# Altium PCB honda_nidec_giraffe20.pcbdoc
Units mil, origin at the board's own origin, x right, y up, seen from the top; angles counter-clockwise.
Board outline 4959.99 x 2260 mil, 2 copper layers (Top Layer, Bottom Layer); 6 components, 21 nets, 86 pads, 34 vias.
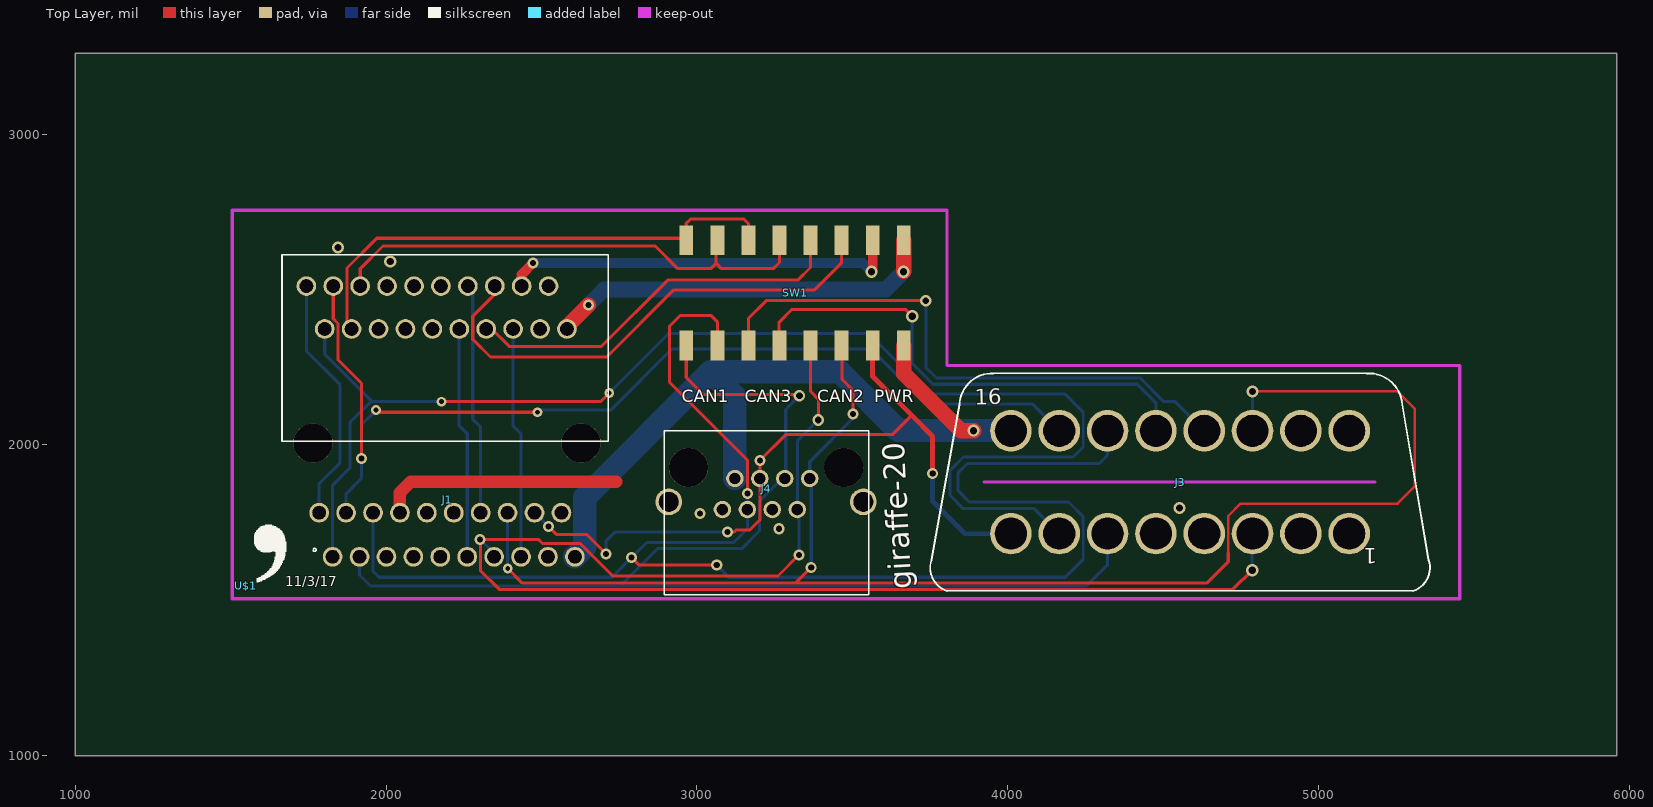
[diagram p0: Top Layer view]
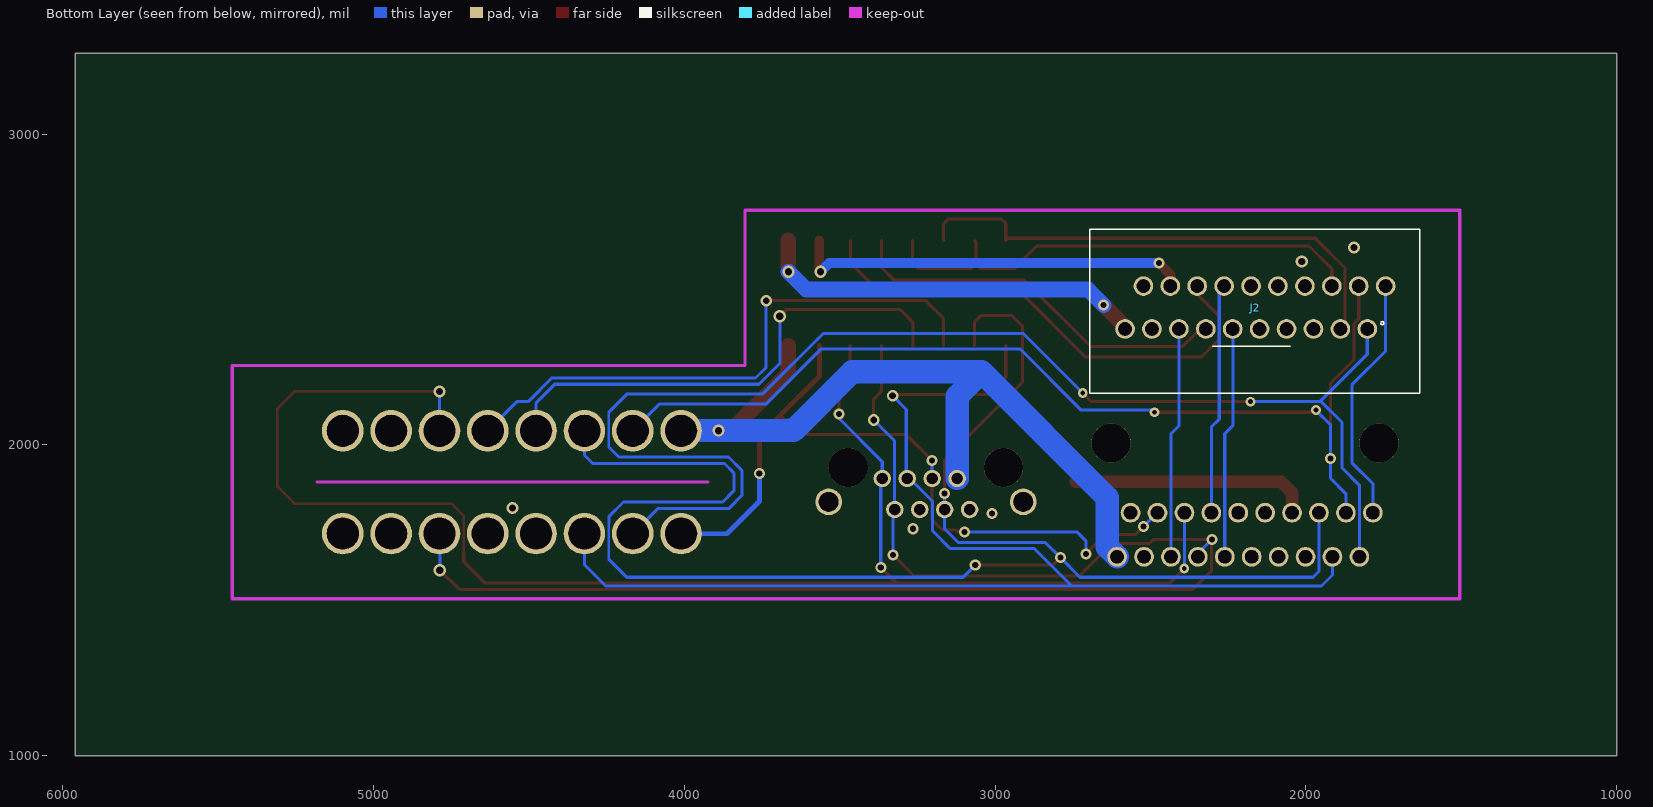
[diagram p1: Bottom Layer view, seen from below]

## Layer stack, top to bottom
Top Layer: signal copper (thickness not stored)
Dielectric: dielectric 12.6, FR-4, Dk 4.8
Bottom Layer: signal copper (thickness not stored)

## Board outline
5959.99,1000 1000,1000 1000,3260 5959.99,3260

## Components (designator, comment, footprint, x,y, rotation, side; value= is the part's Value field where it differs from the comment)
J1 "_" 2X10(RA) 2215,1712 r180 top
J2 "_" 2X10(JAE_FEMALE) 2145,2442 r0 bottom
J3 "OBDII-FEMALE-CUT" OBDII-FEMALE-MIDCUT 4554.99,1880 r0 top
J4 "VERT_RJ45" GLX-S-88M 3226.26,1730 r0 top
SW1 "4XDPSTSMT" 4-DPST 3316.02,2489 r0 top
U$1 "_" LOGO 1549,1546 r0 top

## Footprints (in the part's own frame and the unit in brackets; to place one, negate y for a bottom-side part, rotate by r counter-clockwise, add the part's x,y. Pads: shape width x height; smd on the part's side, far side on the other; paste and mask are expansions set on the pad)
2X10(JAE_FEMALE) [mm]
  round 1.608 hole 1.1 slot 1.1 at 0 deg: 1(-8.7,1.75) 2(-6.5,1.75) 3(-4.3,1.75) 4(-2.1,1.75) 5(0.1,1.75) 6(2.3,1.75) 7(4.5,1.75) 8(6.7,1.75) 9(8.9,1.75) 10(11.1,1.75) 11(-10.2,-1.75) 12(-8,-1.75) 13(-5.8,-1.75) 14(-3.6,-1.75) 15(-1.4,-1.75) 16(0.8,-1.75) 17(3,-1.75) 18(5.2,-1.75) 19(7.4,-1.75) 20(9.6,-1.75)
  silkscreen extent -13,-6.4 14,7
2X10(RA) [mm]
  round 1.608 hole 1.1 slot 1.1 at 0 deg: 1(9.83,1.83) 2(7.63,1.83) 3(5.43,1.83) 4(3.23,1.83) 5(1.03,1.83) 6(-1.17,1.83) 7(-3.37,1.83) 8(-5.57,1.83) 9(-7.77,1.83) 10(-9.97,1.83) 11(10.93,-1.77) 12(8.73,-1.77) 13(6.53,-1.77) 14(4.33,-1.77) 15(2.13,-1.77) 16(-0.07,-1.77) 17(-2.27,-1.77) 18(-4.47,-1.77) 19(-6.67,-1.77) 20(-8.87,-1.77)
  round 3.2 hole 3.2 unplated: ""(-10.47,-7.47) ""(11.43,-7.47)
  silkscreen extent -12.7,-22.86 13.97,1.4
4-DPST [mil]
  rect 44.48x96.06 smd: 1(-350,-169.29) 2(-250,-169.29) 3(-150,-169.29) 4(-50,-169.29) 5(50,-169.29) 6(150,-169.29) 7(250,-169.29) 8(350,-169.29) 9(350,169.29) 10(250,169.29) 11(150,169.29) 12(50,169.29) 13(-50,169.29) 14(-150,169.29) 15(-250,169.29) 16(-350,169.29)
GLX-S-88M [mil]
  round 56 hole 35.44 slot 35.45 at 0 deg: 1(-144.1,61.81) 2(-103.94,161.81) 3(-63.78,61.81) 4(-23.63,161.81) 5(16.53,61.81) 6(56.69,161.81) 7(96.85,61.81) 8(137,161.81)
  round 86 hole 63: S1(-316.54,86.61) S2(309.44,86.61)
  round 125.98 hole 125.98 unplated: ""(-253.55,196.85) ""(246.45,196.85)
  silkscreen extent -331,-213 327,315
LOGO [mil]
  silkscreen extent 26,12 129,196
OBDII-FEMALE-MIDCUT [mm]
  round 3.4 hole 2.6 slot 2.605 at 0 deg: 1(13.825,-4.2) 2(9.875,-4.2) 3(5.925,-4.2) 4(1.975,-4.2) 5(-1.975,-4.2) 6(-5.925,-4.2) 7(-9.875,-4.2) 8(-13.825,-4.2) 9(13.825,4.2) 10(9.875,4.2) 11(5.925,4.2) 12(1.975,4.2) 13(-1.975,4.2) 14(-5.925,4.2) 15(-9.875,4.2) 16(-13.825,4.2)
  silkscreen extent -20.42,-8.89 20.42,8.89

## Via types
v1: diameter 35.69, hole 19.68, Top Layer to Bottom Layer, 17 vias
v2: diameter 39.62, hole 23.62, Top Layer to Bottom Layer, 9 vias
v3: diameter 31.75, hole 15.74, Top Layer to Bottom Layer, 4 vias
v4: diameter 37.65, hole 21.66, Top Layer to Bottom Layer, 3 vias
v5: diameter 31, hole 15, Top Layer to Bottom Layer, 1 vias

## Nets (pads, with @x,y where several pads share a name; then routed paths per layer and width w, separated by ;. In a path a pad name is that pad's centre, name@x,y a point inside that pad or via, vN(x,y) a via of type N, cw(c..) or ccw(c..) an arc to the next point about the centre after c; other vN are vias at no path point)
12VIN: J1.10 J3.16 J4.2 SW1.8 | length 2588.4
  Top Layer w50: SW1.8 3666.02,2229.44 3849.46,2046 v2(3890.46,2046)
  Bottom Layer w75: J1.10 2639.36,1671.8 2639.36,1830.37 3044,2235 ; J4.2 3122.32,2156.68 3044,2235 ; 3663,2047 3663,2046 ; J3.16 4010.06,2046 v2(3890.46,2046) 3663,2046 ; 3044,2235 3460,2235 3649,2046 3663,2046
12VIN': J2.10 SW1.9 | length 1265.5
  Top Layer w32: v2(3665,2557) v2@3666.02,2558.02
  Top Layer w50: J2.10 2582.01,2381.01 v1(2651,2450) ; v2@3666.02,2558.02 SW1.9
  Bottom Layer w50: v1(2651,2450) 2701,2500 3608,2500 v2(3665,2557)
CAN1_H: J1.2 J3.6 J4.6 SW1.1 | length 4125.9
  Top Layer w10: SW1.1 2966.02,2216.97 3021,2162 3326,2162 v4(3330,2158)
  Bottom Layer w10: J1.2 1914.61,1581.39 1950,1546 2753.29,1546 ; 2949,1666 2955,1666 ; 3286,2028 3286,2022.36 ; v4(3330,2158) 3286,2114 3286,2022.36 ; J3.6 4321.99,1714.38 4321.99,1615 4252.99,1546 2753.29,1546 ; 2753.29,1546 2873.29,1666 2955,1666 ; 2955,1666 3144,1666 3201.48,1723.48 3201.48,1818.48 3274.81,1891.81 J4.6 3286,1894.86 3286,2022.36
CAN1_H': J2.2 SW1.14 SW1.16 | length 1657.2
  Top Layer w10: J2.2 1874,2388.2 1874,2569 1970,2665 2959.31,2665 SW1.16 2966,2713 2980,2727 3151,2727 3166.02,2711.97 SW1.14
CAN1_L: J1.13 J3.14 J4.3 SW1.2 | length 5217.3
  Top Layer w10: v1(2790,1638) 2815,1613 v1(3064,1613) ; SW1.2 3066.02,2395.97 3046,2416 2946,2416 2912,2382 2912,2202 3163,1951 v1(3163,1843)
  Bottom Layer w8: 4242.99,1632 4242.99,1682.63 4243.14,1682.78 4243.14,1746.51 ; 4242.99,1746.66 4243.14,1746.51 ; 4242.99,1748.07 4243.14,1747.92 4243.14,1746.51
  Bottom Layer w10: J1.13 1957.91,1593.09 1977,1574 2727,1574 v1@2791,1638 ; v1(2790,1638) v1@2791,1638 ; v1(3064,1613) 3103,1574 4184.99,1574 4242.99,1632 ; v1(3163,1843) 3163,1792.33 J4.3 3163,1791.29 3163,1730 3119,1686 2839,1686 v1@2791,1638 ; 4177.99,1816 4154.99,1816 ; 4242.99,1748.07 4242.99,1769 4195.99,1816 4154.99,1816 ; J3.14 4321.73,1966.85 4294.87,1940 3871,1940 3841,1910 3841,1852 3877,1816 4154.99,1816
CAN1_L': J2.13 SW1.13 SW1.15 | length 1635.3
  Top Layer w10: J2.13 1917,2511.24 1917,2567 1990,2640 2866,2640 2939,2567 3045,2567 3062,2584 ; SW1.15 3062,2654.27 3062,2584 ; SW1.13 3266.02,2587.02 3246,2567 3079,2567 3062,2584
CAN2_H: J1.7 J3.3 J4.7 SW1.5 | length 4649.2
  Top Layer w10: v1(3329,1646) 3261,1578 2729.79,1578 2625.19,1682.61 2503.24,1682.61 2489.84,1696 v1(2302,1696) 2304,1694 2304,1595 2364,1535 4724.99,1535 v2(4786.99,1597) ; SW1.5 3366.02,2171.98 3391,2147 v4(3391,2080)
  Bottom Layer w10: v1(2302,1696) 2347.68,1650.32 J1.7 ; v1(3329,1646) 3329,1785.92 J4.7 3324,1792.7 3324,2013 v4(3391,2080) v4@3391,2078 ; v2(4786.99,1597) 4786.99,1713.38 J3.3
CAN2_H': J2.7 SW1.12 | length 1259.6
  Top Layer w10: J2.7 2339.9,2373.1 2396,2317 2693,2317 2906,2530 3325,2530 3366,2571 SW1.12
CAN2_L: J1.18 J3.11 J4.8 SW1.6 | length 5113.8
  Top Layer w8: 4709.99,1652 4709.99,1771 4749.99,1811 5254.99,1811 5309.99,1866 5309.99,2117 5254.99,2172 4788.53,2172 v2@4788.26,2171.73
  Top Layer w10: v5(2391,1602) 2437,1556 3318,1556 ; v1(3368,1606) 3318,1556 ; SW1.6 3467,2318.73 3467,2211 3502,2176 v1(3502,2099) ; 4709.99,1652 4709.99,1624 4641.99,1556 3318,1556 ; v2(4787.99,2172) v2@4788.26,2171.73
  Bottom Layer w10: v5(2391,1602) J1.18 ; v1(3368,1606) 3368,1887.08 J4.8 3363.26,1946.27 3502,2085 v1(3502,2099) ; v2(4787.99,2172) 4787.99,2045.62 J3.11
CAN2_L': J2.18 SW1.11 | length 1608.2
  Top Layer w10: J2.18 2349.72,2484.72 2279,2414 2279,2340 2336,2283 2710,2283 2926,2499 3379,2499 3465,2585 SW1.11
CAN3_H: J3.12 SW1.3 | length 1877.4
  Top Layer w10: SW1.3 3166,2407 3223,2464 v4(3737,2464)
  Bottom Layer w10: v4(3737,2464) 3737,2249 3771,2215 4426.99,2215 4502.99,2139 4539.1,2139 J3.12 J3.12@4632.99,2045.6
CAN3_L: J3.13 SW1.4 | length 1608.4
  Top Layer w10: SW1.4 3265,2320.73 3265,2395 3306,2436 3671,2436 v2(3693,2414)
  Bottom Layer w10: v2(3693,2414) 3693,2262 3760,2195 4417.37,2195 4476.99,2135.38 4476.99,2045.6 J3.13
GND: J1.14 J2.14 J3.4 J3.5 J4.1 J4.5 | length 774.6
  Top Layer w40: J1.14 2044.53,1846.53 2079,1881 2740,1881
  other v1: 3264,1730 3010,1779
  other v2: 4552.99,1797 2013,2590 1845,2635
IGN: J1.19 J3.8 J4.4 SW1.7 | length 2540.2
  Top Layer w10: v1@2534,1726 v1(2523,1737) 2548,1712 2645,1712 v1(2708,1649) ; v1(3099,1720) 3120,1720 3126,1726 3170,1726 3203,1759 v1(3203,1950) 3286,2033 3629.19,2033 3691.09,2094.9
  Top Layer w16: SW1.7 3566.02,2219.97 3691.09,2094.9 3759,2027 v1(3759,1908)
  Bottom Layer w10: J1.19 2478.31,1781.68 v1(2523,1737) ; v1(2708,1649) 2708,1691 2737,1720 v1(3099,1720) ; J4.4 3202.63,1949.64 v1(3203,1950)
  Bottom Layer w16: v1(3759,1908) 3759,1818 3863,1714 4010.06,1714 J3.8
IGN': J2.19 SW1.10 | length 1292.8
  Top Layer w32: J2.19 2436.34,2548.34 v1(2473,2585) ; v2(3562,2557) 3566.02,2561.02 SW1.10
  Bottom Layer w32: v1(2473,2585) 3534,2585 v2(3562,2557)
K_LIN: J1.1 J2.1 J3.7 | length 4389.3
  Top Layer w10: v3(2178,2139) 2690,2139 v3(2718,2167)
  Bottom Layer w8: 4242.99,2105 4242.99,2077.37 4243.14,2077.22 4243.14,1992.97
  Bottom Layer w10: J2.1 1802.48,2291.52 1955,2139 ; J1.1 1827.99,1869.99 1884,1926 1884,2072.51 1950.49,2139 1955,2139 ; v3(2178,2139) 1955,2139 ; v3(2718,2167) 2909,2358 3554,2358 3748,2164 4183.99,2164 4242.99,2105 ; J3.7 4085.86,1795 3857,1795 3815,1837 3815,1918 3858,1961 4211.17,1961 4243.14,1992.97
L_LIN: J1.12 J2.12 J3.15 | length 3358
  Top Layer w10: J2.12 1830.04,2405.86 1845.13,2390.77 1845.13,2355.43 ; 1845,2355.3 1845.13,2355.43 ; v1(1921,1956) 1921,2198 1845.13,2273.86 1845.13,2355.43 ; v3(1968,2112) 1975,2105 v3(2487,2105)
  Bottom Layer w10: J1.12 1871.3,1843.3 1921,1893 v1(1921,1956) 1921,2065 v3(1968,2112) ; v3(2487,2105) 2494,2112 2723,2112 2920,2309 3560,2309 3738,2131 4080.57,2131 J3.15
LDW_IND: J1.11 J2.11 | length 802.1
  Bottom Layer w10: J2.11 1744,2510.32 1744,2301 1852,2193 1852,1943 1784.68,1875.68 J1.11
LDW_SW: J1.8 J2.8 | length 765.7
  Bottom Layer w10: J2.8 2409,2372.88 2409,2255 ; 2409,2233 2409,2255 ; J1.8 2434.29,2035.71 2409,2061 2409,2255
MDX_CANH: J1.6 J2.6 | length 744.2
  Bottom Layer w10: J2.6 2235,2372.55 2235,2062 2261.06,2035.94 J1.6
MDX_CANL: J1.17 J2.17 | length 749.3
  Bottom Layer w10: J2.17 2279,2495.01 2279,2205 ; 2279,2202 2279,2205 ; J1.17 2304.37,2057.63 2279,2083 2279,2205
pads on no net: J1. J1.3 J1.4 J1.5 J1.9 J1.15 J1.16 J1.20 J2.3 J2.4 J2.5 J2.9 J2.15 J2.16 J2.20 J3.1 J3.2 J3.9 J3.10 J4. J4.S1 J4.S2

## Polygon pours and split planes (outlines as drawn)
GND on Bottom Layer (solid): 1503,2757 3805,2757 3805,2253 5453.99,2253 5453.99,1505 1503,1505
GND on Top Layer (solid): 1505,2755 1505,1505 5454.99,1505 5454.99,2255 3805,2255 3805,2755

## Silkscreen, mask and mechanical layers (free items; w line width, h text height)
Top Overlay:
  text "CAN1" at 2951,2137 h40
  text "CAN3" at 3154,2137 h40
  text "CAN2" at 3387,2137 h40
  text "PWR" at 3571,2137 h40
  text "11/3/17" at 1675.4,1545 h32
  text "giraffe-20" at 3690.95,1537.83 h70 r93
Document:
  region: 3316,1530 3316,1512 3347,1512 3347,1530
  lines w10: 3114,2119 3114,2191 ; 3365,2122 3365,2194 ; 3538,2125 3538,2197 ; 3704,2122 3704,2194 ; 3316,1512 3316,1530 3347,1530 3347,1512 3316,1512
  text "*compatible with freeTheC pins soldered on TOP" at 4197.59,2296 h16

## Text inside footprints (layer, text, board x,y; h text height)
J3: Top Overlay "1" at 5189.99,1666.97 h50 r180; Top Overlay "16" at 3894.21,2129.41 h50 r1